# EAGLE board schema_dubbellayer (EAGLE 6.4)
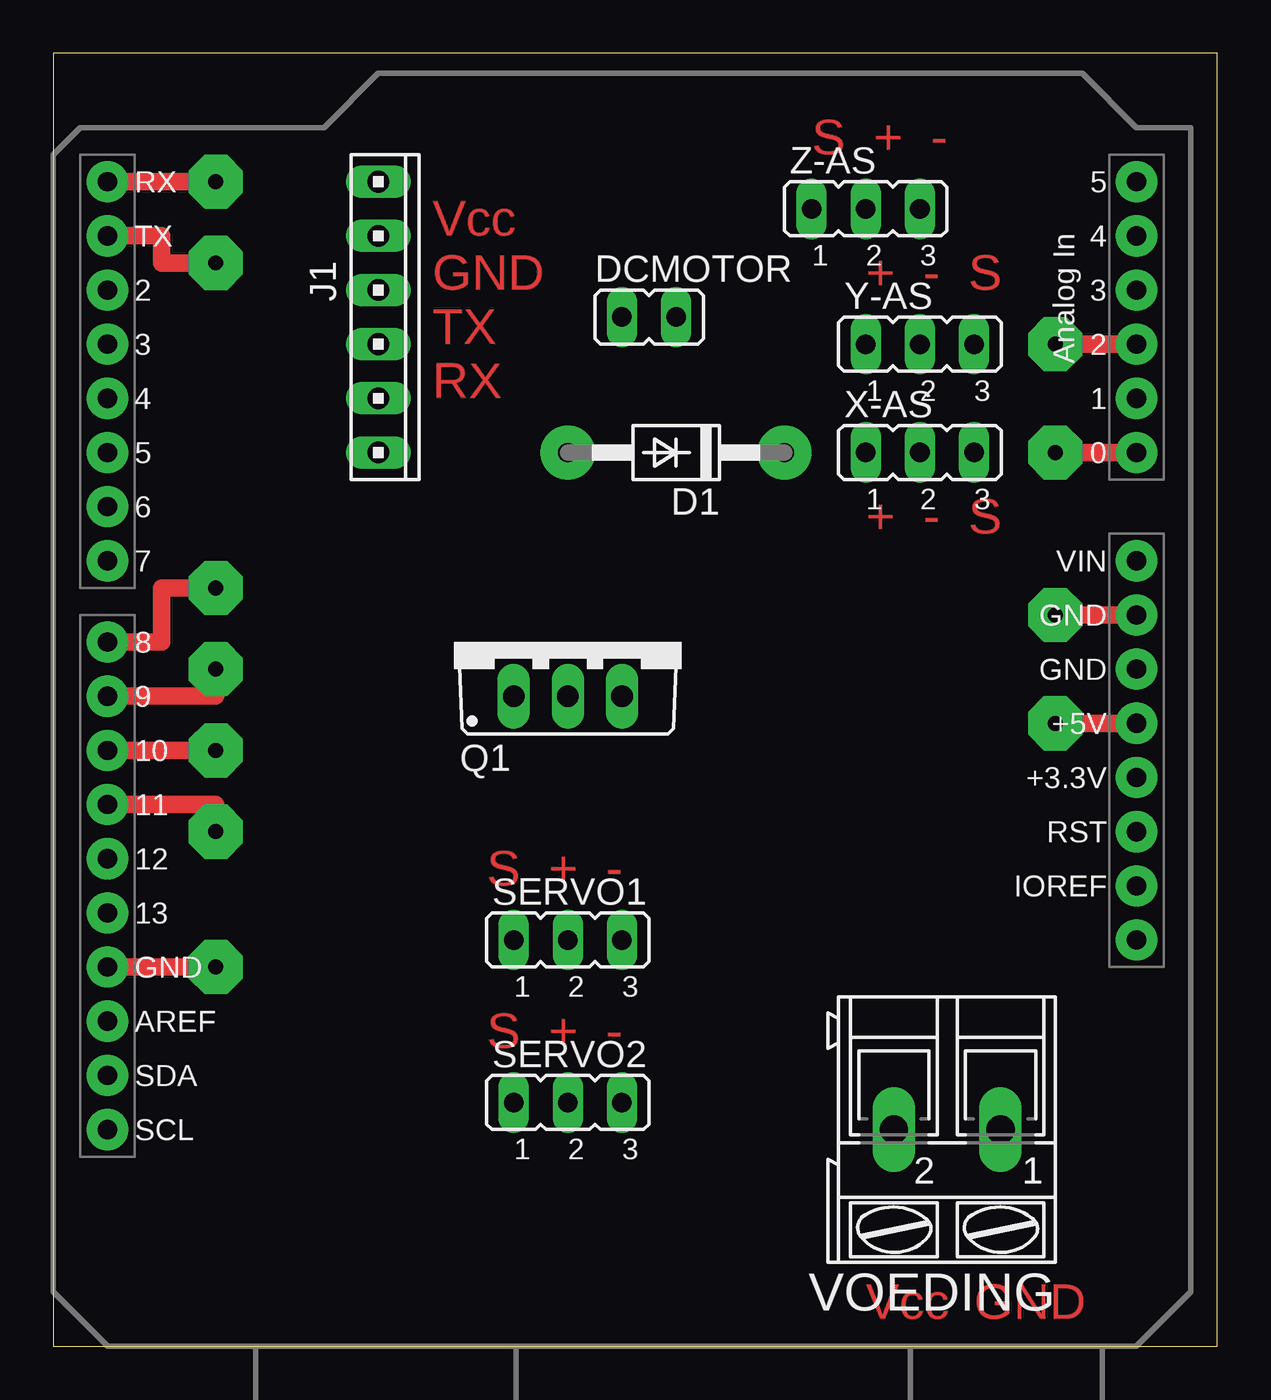
[diagram p0: board, top side]
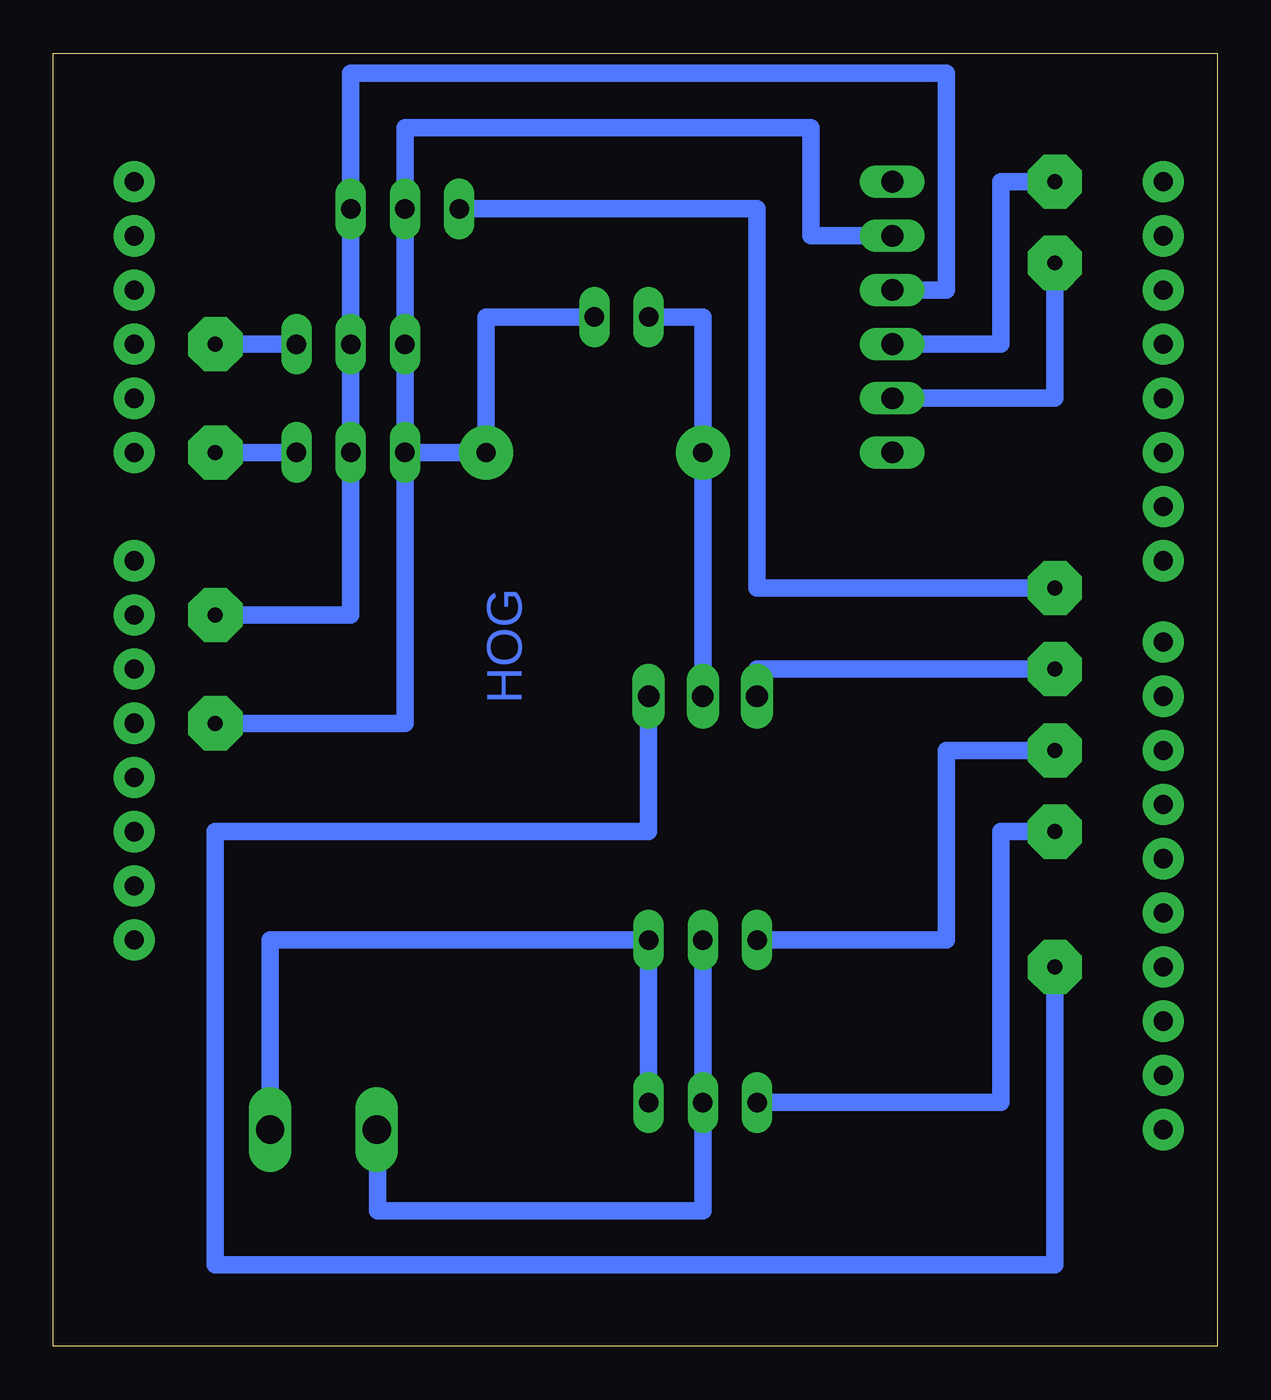
[diagram p1: board, bottom side, seen from below]

Size 54.59 x 60.63 mm. Coordinates in mm from the lower left corner, seen from the top.
Outline: 0,0 54.59,0 54.59,60.63 0,60.63 0,0
Copper layers (1*16): Top 0.035mm / dielectric 1.5mm / Bottom 0.035mm
Design rules "default": minimum track width 10mil, minimum drill 24mil, track to track 8mil, track to pad 8mil, pad to pad 8mil, via to via 8mil, smd to smd 8mil, copper to edge 40mil, drill to drill 8mil, minimum pad ring 10mil, minimum via ring 8mil, stop-mask expansion 4mil, vias tented up to drill 0mil, thermal gap 10mil

## Footprints (pad centres in the part's own frame; a part is rotated, then mirrored left to right if it is on the bottom)
DO41-10 = drill 0.9 pad 2.54: A 5.08,0; C -5.08,0
JP1 = drill 0.914 long: 1 0,-1.27; 2 0,1.27
10X06MTA = drill 1.016 long: 1 6.35,0; 2 3.81,0; 3 1.27,0; 4 -1.27,0; 5 -3.81,0; 6 -6.35,0
TO220BV = drill 1.016 long: D 0,-2.54; G -2.54,-2.54; S 2.54,-2.54
JP2 = drill 0.914 long: 1 -2.54,0; 2 0,0; 3 2.54,0
UNO_R3_SHIELD = drill 0.9 pad 1.93: 3.3V 50.8,26.67; 5V 50.8,29.21; A0 50.8,41.91; A1 50.8,44.45; A2 50.8,46.99; A3 50.8,49.53; A4 50.8,52.07; A5 50.8,54.61; AREF 2.54,15.24; D2 2.54,49.53; D3 2.54,46.99; D4 2.54,44.45; D5 2.54,41.91; D6 2.54,39.37; D7 2.54,36.83; D8 2.54,33.02; D9 2.54,30.48; D10 2.54,27.94; D11 2.54,25.4; D12 2.54,22.86; D13 2.54,20.32; GND@0 50.8,31.75; GND@1 50.8,34.29; GND@2 2.54,17.78; IOREF 50.8,21.59; NC 50.8,19.05; RES 50.8,24.13; RX 2.54,54.61; SCL 2.54,10.16; SDA 2.54,12.7; TX 2.54,52.07; VIN 50.8,36.83
AK300/2 = drill 1.321 long: 1 -2.515,0; 2 2.489,0

## Placement (x,y rotation side)
D1  1N4004  [DO41-10]  29.21,41.91 180 top
DCMOTOR  [JP1]  27.94,48.26 270 top
J1  [10X06MTA]  15.24,48.26 270 top
Q1  IRF520  [TO220BV]  24.13,33.02 0 top
SERVO1  [JP2]  24.13,19.05 0 top
SERVO2  [JP2]  24.13,11.43 0 top
U$2  ARDUINO_R3_SHIELD  [UNO_R3_SHIELD]  0,0 0 top
VOEDING  [AK300/2]  41.91,10.16 180 top
X-AS  [JP2]  40.64,41.91 0 top
Y-AS  [JP2]  40.64,46.99 0 top
Z-AS  [JP2]  38.1,53.34 0 top

## Library data of the parts
D1 = diode
DCMOTOR SERVO1 SERVO2 X-AS Y-AS Z-AS = jumper
J1 = con-amp
Q1 = transistor-power
U$2 = SparkFun-Boards
VOEDING = con-ptr500; OC_FARNELL: unknown; OC_NEWARK: unknown

## Nets
N$1: U$2.A0 X-AS.3
N$2: U$2.A2 Y-AS.3
N$3: D1.A DCMOTOR.1 Q1.D
N$4: J1.4 U$2.GND@1 X-AS.2 Y-AS.2 Z-AS.3
N$5: Q1.G U$2.D9
N$6: Q1.S U$2.GND@2
N$7: U$2.D8 Z-AS.1
N$8: SERVO1.1 U$2.D10
N$9: SERVO2.1 U$2.D11
N$11: D1.C DCMOTOR.2 J1.5 U$2.5V X-AS.1 Y-AS.1 Z-AS.2
N$12: SERVO1.2 SERVO2.2 VOEDING.2
N$13: SERVO1.3 SERVO2.3 VOEDING.1
N$15: J1.2 U$2.TX
N$16: J1.3 U$2.RX

## Tracks (layer width: path | path; a pad name or v marks a point on that pad's centre or on a via)
N$1  (via drill 0.7 pad 2.54)
  Top 0.813: U$2.A0 v46.99,41.91
  Bottom 0.813: X-AS.3 v46.99,41.91
N$2  (via drill 0.7 pad 2.54)
  Top 0.813: U$2.A2 v46.99,46.99
  Bottom 0.813: Y-AS.3 v46.99,46.99
N$3
  Bottom 0.813: DCMOTOR.1 24.13,48.26 D1.A Q1.D
N$4  (via drill 0.7 pad 2.54)
  Top 0.813: U$2.GND@1 v46.99,34.29
  Bottom 0.813: v46.99,34.29 40.64,34.29 X-AS.2 Y-AS.2 Z-AS.3 40.64,59.69 12.7,59.69 12.7,49.53 J1.4
N$5  (via drill 0.7 pad 2.54)
  Top 0.813: U$2.D9 7.62,30.48 v7.62,31.75
  Bottom 0.813: v7.62,31.75 21.59,31.75 Q1.G
N$6  (via drill 0.7 pad 2.54)
  Top 0.813: U$2.GND@2 v7.62,17.78
  Bottom 0.813: Q1.S 26.67,24.13 46.99,24.13 46.99,3.81 7.62,3.81 v7.62,17.78
N$7  (via drill 0.7 pad 2.54)
  Top 0.813: U$2.D8 5.08,33.02 5.08,35.56 v7.62,35.56
  Bottom 0.813: Z-AS.1 21.59,53.34 21.59,35.56 v7.62,35.56
  other vias: 7.62,50.8 7.62,54.61
N$8  (via drill 0.7 pad 2.54)
  Top 0.813: U$2.D10 v7.62,27.94
  Bottom 0.813: SERVO1.1 12.7,19.05 12.7,27.94 v7.62,27.94
N$9  (via drill 0.7 pad 2.54)
  Top 0.813: U$2.D11 7.62,25.4 v7.62,24.13
  Bottom 0.813: SERVO2.1 10.16,11.43 10.16,24.13 v7.62,24.13
N$11  (via drill 0.7 pad 2.54)
  Top 0.813: U$2.5V v46.99,29.21
  Bottom 0.813: X-AS.1 Y-AS.1 Z-AS.2 38.1,57.15 19.05,57.15 19.05,52.07 J1.5 | X-AS.1 D1.C 34.29,48.26 DCMOTOR.2 | X-AS.1 38.1,29.21 v46.99,29.21
N$12
  Bottom 0.813: SERVO1.2 SERVO2.2 24.13,6.35 39.37,6.35 39.37,10.16 VOEDING.2
N$13
  Bottom 0.813: SERVO2.3 SERVO1.3 44.42,19.05 VOEDING.1
N$15  (1 unrouted)
  Top 0.813: U$2.TX 5.08,52.07 5.08,50.8 7.62,50.8
  Bottom 0.813: J1.2 7.62,44.45 7.62,50.8
N$16  (1 unrouted)
  Top 0.813: U$2.RX 7.62,54.61
  Bottom 0.813: J1.3 10.16,46.99 10.16,54.61 7.62,54.61

## Text on the board
Top: S + - | Vcc | GND | + - S | TX | RX | + - S | S + - | S + - | Vcc | GND
Bottom: HOG